# EAGLE board Light_sensor_multi_genuv_si1151 (EAGLE 9.3.2)
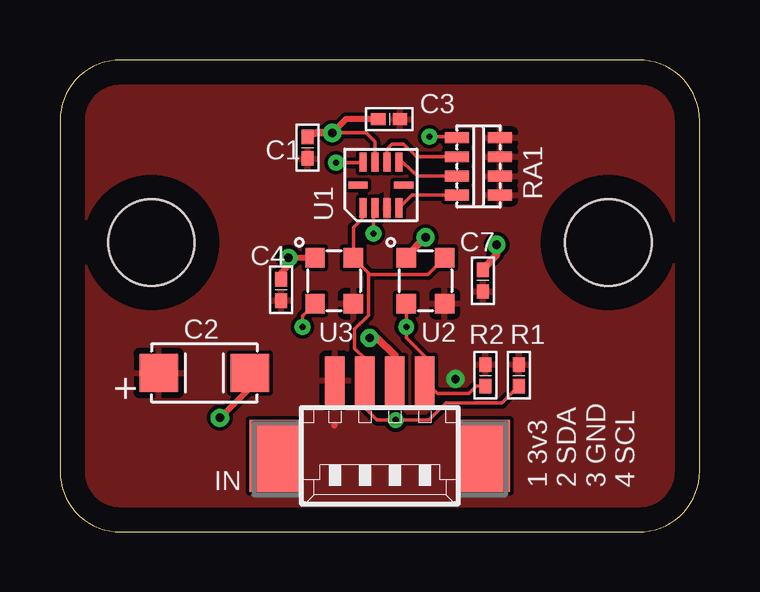
[diagram p0: board, top side]
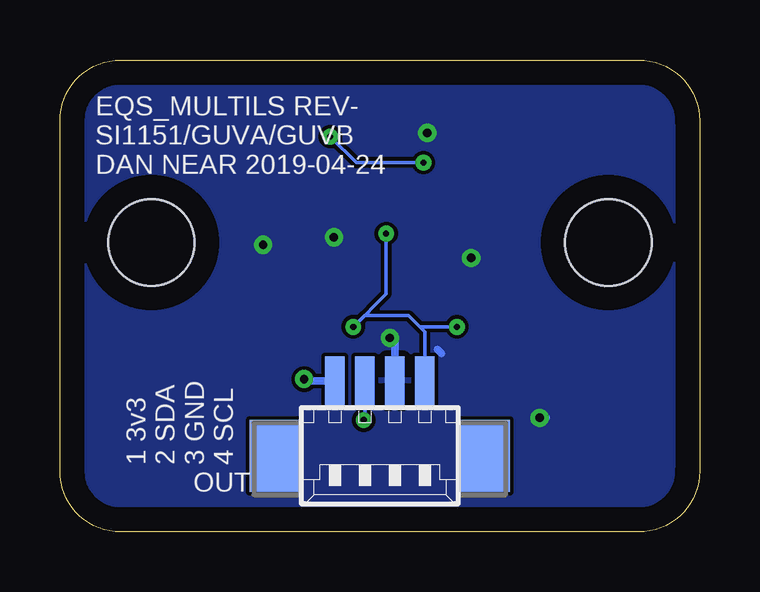
[diagram p1: board, bottom side, seen from below]

Size 26.67 x 19.68 mm. Coordinates in mm from the lower left corner, seen from the top.
Outline: 0,17.14 0,2.54 arc90 2.54,0 24.13,0 arc90 26.67,2.54 26.67,17.14 arc90 24.13,19.68 2.54,19.68 arc90 0,17.14
Copper layers (1*16): Top 0.035mm / dielectric 1.5mm / Bottom 0.035mm
Design rules "default": minimum track width 6mil, minimum drill 0.35mm, track to track 6mil, track to pad 6mil, pad to pad 6mil, via to via 6mil, smd to smd 6mil, copper to edge 40mil, drill to drill 6mil, minimum pad ring 10mil, minimum via ring 8mil, stop-mask expansion 4mil, vias tented up to drill 0mil, thermal gap 10mil
Holes 3.6 mm at 3.81,12.06 22.86,12.06
tKeepout: area 0.8,9.1 to 6.8,15.1; area 19.9,9.1 to 25.9,15.1

## Footprints (pad centres in the part's own frame; a part is rotated, then mirrored left to right if it is on the bottom)
SMD_0402 = smd 0.6 x 0.5: P$1 -0.45,0; P$2 0.45,0
CAP_POL_1206 = smd 1.6 x 1.6: N 1.9,0; P -1.9,0
53261-04 = smd 0.8 x 2: 1 1.875,-2.5; 2 0.625,-2.5; 3 -0.625,-2.5; 4 -1.875,-2.5 | smd 2.1 x 3: S1 4.375,0.625; S2 -4.375,0.625
SMD_4X_0603 = smd 0.45 x 1: 1 -1.2,-0.9; 2 -0.4,-0.9; 3 0.4,-0.9; 4 1.2,-0.9; 5 1.2,0.9; 6 0.4,0.9; 7 -0.4,0.9; 8 -1.2,0.9
QFN10 = smd 0.8 x 0.3: P$1 -0.95,0.75; P$2 -0.95,0.25; P$3 -0.95,-0.25; P$4 -0.95,-0.75; P$6 0.95,-0.75; P$7 0.95,-0.25; P$8 0.95,0.25; P$9 0.95,0.75 | smd 0.3 x 0.8: P$5 0,-0.95; P$10 0,0.95
2X2.3OLGA = smd 0.8 x 0.8: P$1 -0.8,0.955; P$2 0.8,0.955; P$3 -0.8,-0.955; P$4 0.8,-0.955

## Placement (x,y rotation side)
C1  0.1uF  [SMD_0402]  10.32,16.03 90 top
C2  10uF  [CAP_POL_1206]  6.02,6.63 0 top
C3  0.1uF  [SMD_0402]  13.73,17.22 0 top
C4  0.1uF  [SMD_0402]  9.21,10.1 270 top
C7  0.1uF  [SMD_0402]  17.63,10.48 270 top
IN  53261-04  [53261-04]  13.34,3.81 180 top
OUT  53261-04  [53261-04]  13.34,3.81 180 bottom
R1  1k8  [SMD_0402]  19.14,6.53 90 top
R2  1k8  [SMD_0402]  17.74,6.53 90 top
RA1  47k  [SMD_4X_0603]  17.45,15.25 270 top
U1  SI115X_I2C_LIGHT_SENSOR_PROX_GM  [QFN10]  13.38,14.47 90 top
U2  GUVA_C32SM  [2X2.3OLGA]  15.24,10.48 0 top
U3  GUVb_C31SM  [2X2.3OLGA]  11.43,10.48 0 top

## Library data of the parts
C1-C4 C7 R1 R2 RA1 U1-U3 = daneagle_db8.0
IN OUT = con-molex; MF: MOLEX; OC_FARNELL: 1125374; OC_NEWARK: unknown

## Nets
3V3: C1.P$1 C2.P C3.P$2 C4.P$2 C7.P$2 IN.1 OUT.1 R1.P$2 R2.P$2 RA1.5 RA1.6 RA1.7 RA1.8 U1.P$3 U2.P$4 U3.P$4
GND: C1.P$2 C2.N C3.P$1 C4.P$1 C7.P$1 IN.3 OUT.3 U1.P$8 U2.P$1 U3.P$1
N$1: RA1.1 U1.P$9
N$2: RA1.3 U1.P$6
N$3: RA1.2 U1.P$7
N$4: RA1.4 U1.P$4
SCL: IN.4 OUT.4 R2.P$1 U1.P$2 U2.P$3 U3.P$3
SDA: IN.2 OUT.2 R1.P$1 U1.P$1 U2.P$2 U3.P$2

## Tracks (layer width: path | path; a pad name or v marks a point on that pad's centre or on a via)
3V3  (via drill 0.35)
  Top 0.254: 11.46,4.47 11.43,4.45
  Top 0.305: v16.49,6.38 16.65,6.38
  Bottom 0.305: OUT.1 16.49,6.31 v16.49,6.38
  pour Top: 0,19.68 0,0 26.67,0 26.67,19.68
GND  (via drill 0.35)
  Top 0.152: 14.44,11.48 U2.P$1 | v11.36,16.65 12.76,16.65 13.13,16.27 U1.P$8
  Top 0.254: U3.P$1 v9.53,11.43 9.53,11.12 9.2,10.8 C4.P$1 | v18.2,11.98 18.2,11.54 | v11.36,16.65 11.94,17.22 C3.P$1 13.09,17.17 | C2.N 7.92,6.02 v6.67,4.76
  Top 0.305: v15.25,12.29 14.44,11.48 | IN.3 13.96,7.35 13.22,8.09 v12.91,8.09 | v11.36,16.65 10.75,16.65 10.4,16.57 C1.P$2 | 18.2,11.54 17.63,10.97 C7.P$1
  Bottom 0.254: v6.67,4.76 6.35,4.76
  Bottom 0.305: 10.93,7.61 10.76,7.44 | v12.91,8.09 12.71,7.89 OUT.3
  pour Bottom: 0,19.68 0,0 26.67,0 26.67,19.68
N$1  (via drill 0.25)
  Top 0.152: v15.4,16.49 16.51,16.49 RA1.1 | v11.51,15.4 12.61,15.4 U1.P$9
  Bottom 0.152: v11.51,15.4 14.31,15.4 v15.4,16.49
N$2
  Top 0.152: RA1.3 14.92,14.85 14.78,14.98 14.73,14.98 14.16,15.55 14.13,15.53 U1.P$6
N$3
  Top 0.152: RA1.2 14.87,15.65 14.33,16.18 13.84,16.18 13.63,15.97 U1.P$7
N$4
  Top 0.152: RA1.4 14.67,14.05 14.28,13.65 14.27,13.65 U1.P$4
SCL  (via drill 0.25)
  Top 0.152: U2.P$3 v14.44,8.56 14.44,8.08 15.21,7.31 IN.4 15.75,5.77 17.05,5.77 17.37,6.08 R2.P$1 | U3.P$3 10.11,9.01 v10.11,8.56 | v13.07,12.45 13.07,13.48 13.1,13.52 U1.P$2
  Bottom 0.152: v10.11,8.56 11.67,8.56 | v13.07,12.45 13.07,9.93 v14.44,8.56 13.97,9.02 12.13,9.02 11.67,8.56 | OUT.4 11.46,8.35 11.67,8.56
SDA  (via drill 0.25)
  Top 0.152: 12.86,10.73 12.86,9.03 12.29,8.46 12.29,7.66 12.71,7.24 IN.2 12.71,5.18 13.22,4.67 v14,4.67 15.39,4.67 16.1,5.38 18.43,5.38 R1.P$1 | 12.86,10.73 12.86,10.8 U3.P$2 12.23,12.7 12.59,13.05 12.59,13.47 U1.P$1 | U2.P$2 15.34,10.73 12.86,10.73
  Bottom 0.152: v14,4.67 13.96,4.71 OUT.2

## Text on the board
tPlace: 1 3v3 / 2 SDA / 3 GND / 4 SCL
bPlace: EQS_MULTILS REV- / SI1151/GUVA/GUVB / DAN NEAR 2019-04-24 | 1 3v3 / 2 SDA / 3 GND / 4 SCL